# Altium PCB CANmon.PcbDoc
Units mm, origin at the board's own origin, x right, y up, seen from the top; angles counter-clockwise.
Board outline 50 x 80 mm, 2 copper layers (Top Layer, Bottom Layer); 38 components, 38 nets, 165 pads, 23 vias.
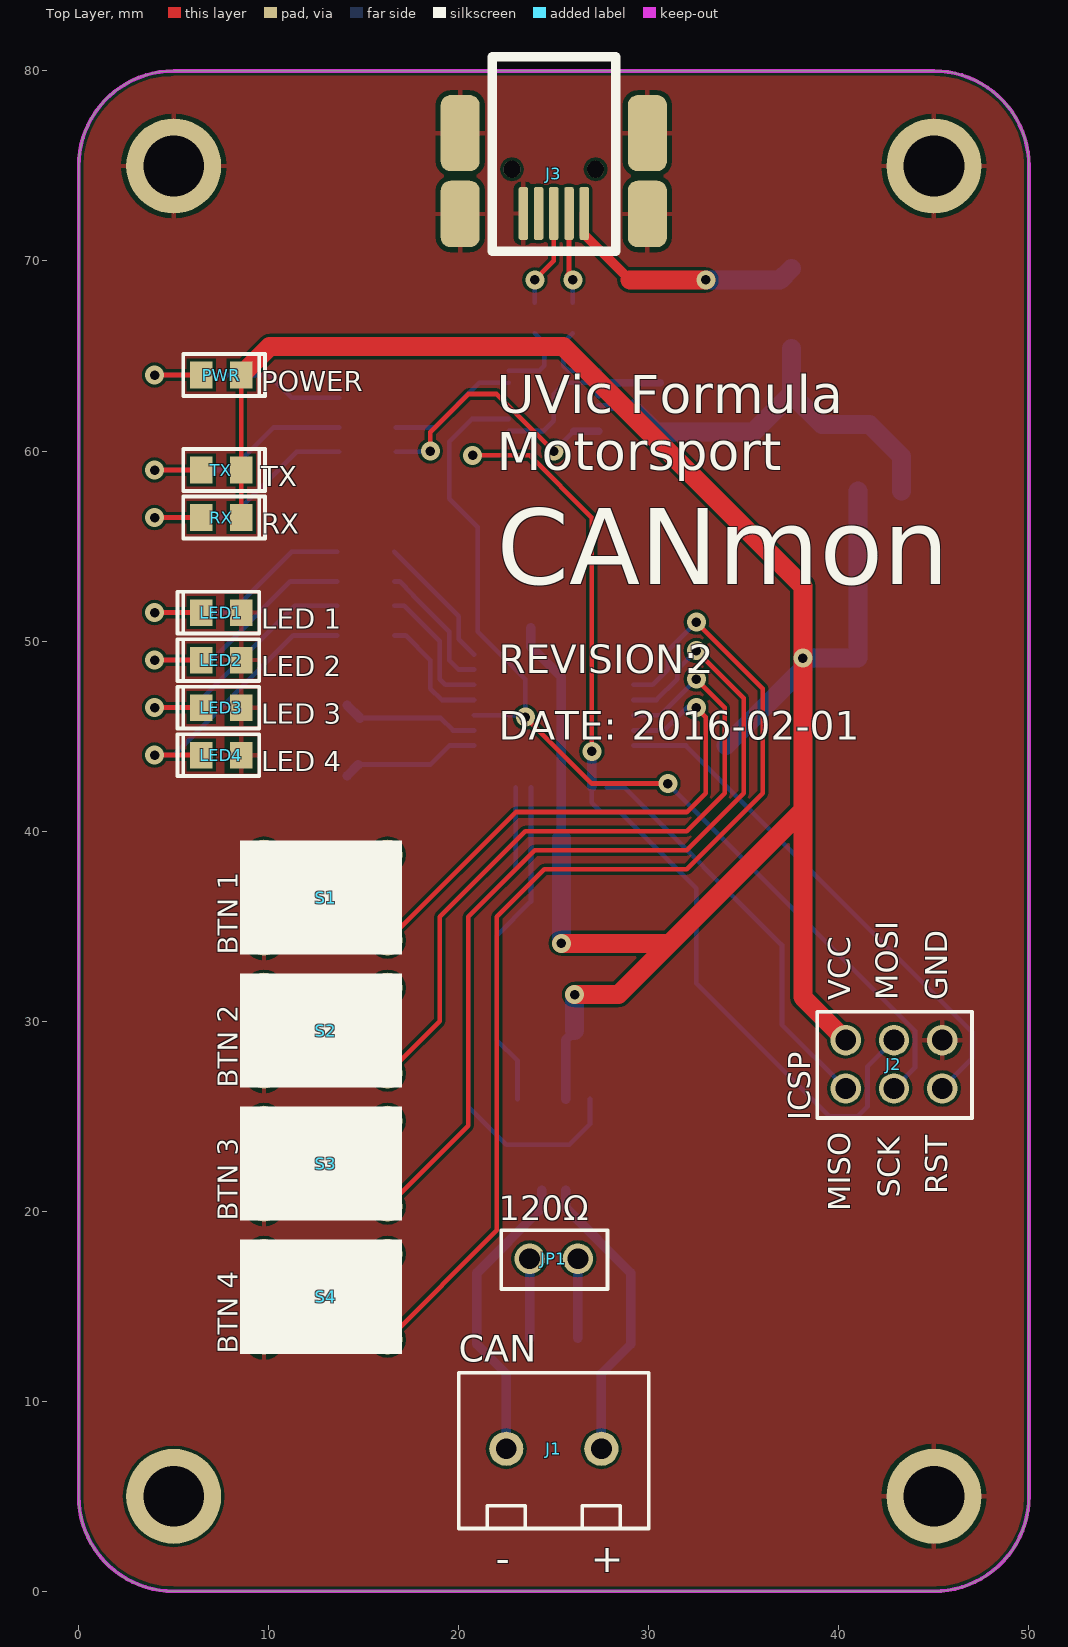
[diagram p0: Top Layer view]
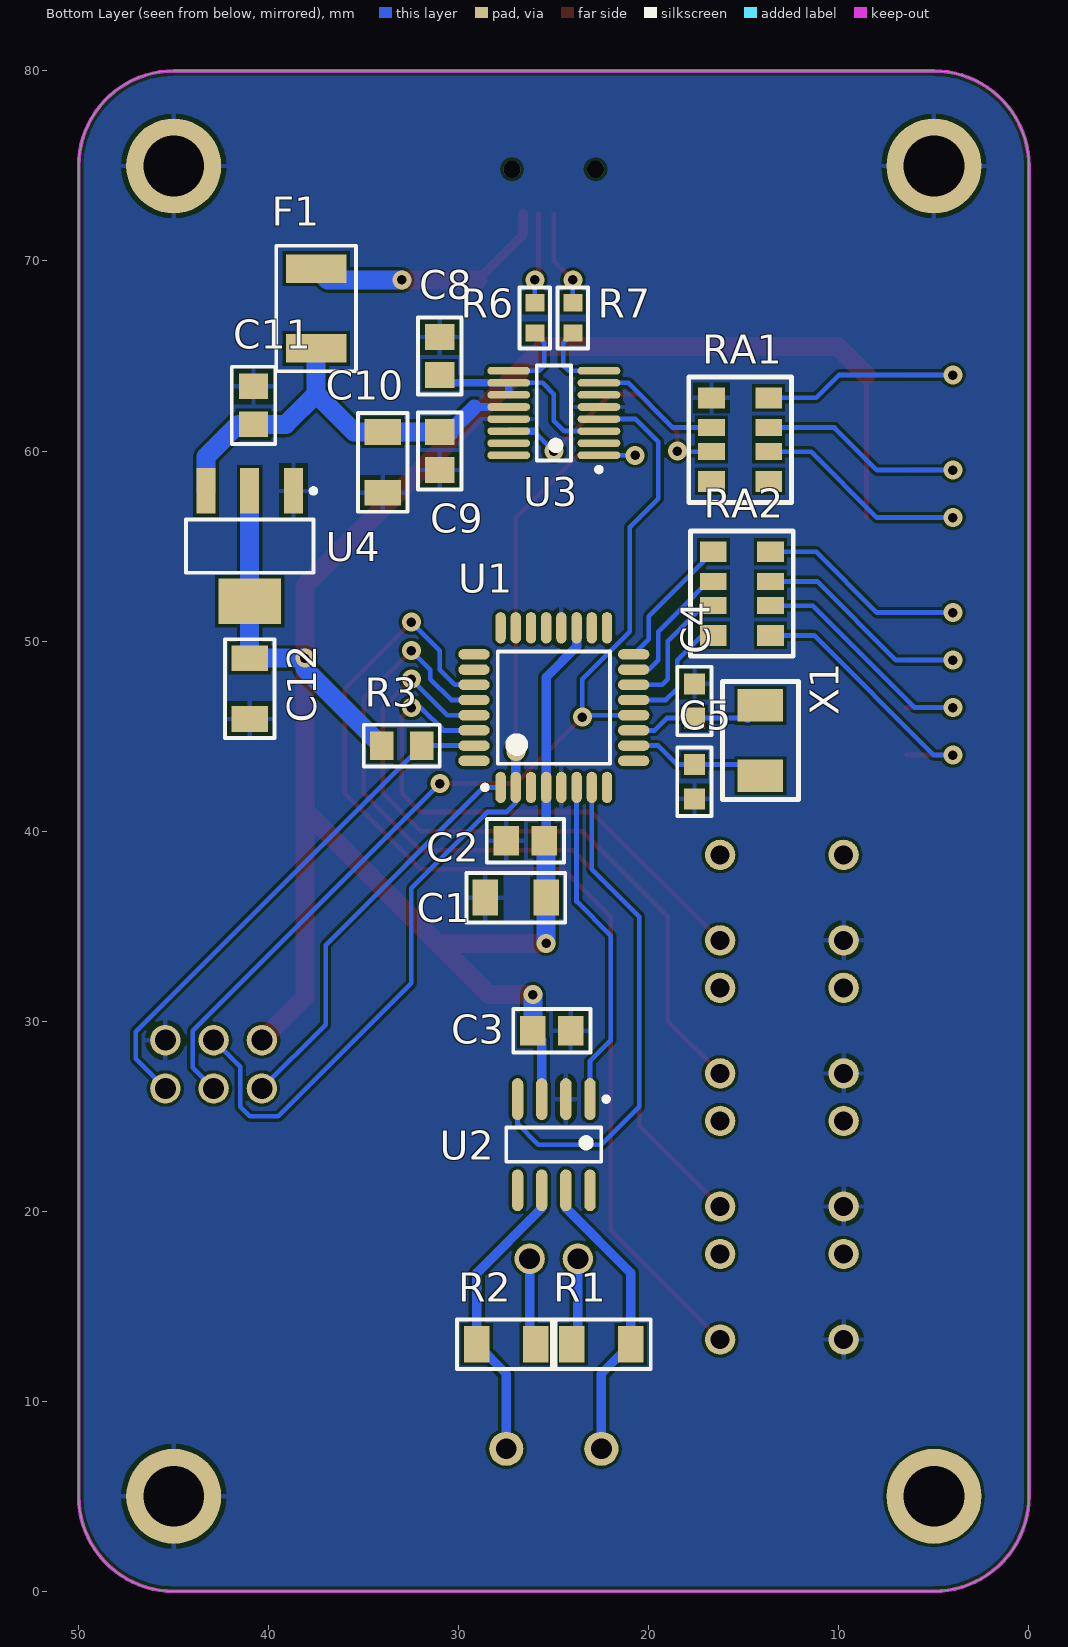
[diagram p1: Bottom Layer view, seen from below]

## Layer stack, top to bottom
Top Solder: solder mask 0.0102, Solder Resist, Dk 3.5
Top Layer: signal copper 0.0356
Dielectric 1: dielectric 0.32, FR-4, Dk 4.8
Bottom Layer: signal copper 0.0356
Bottom Solder: solder mask 0.0102, Solder Resist, Dk 3.5

## Board outline
0,5 0,75 cw(c5,75) 5,80 45,80 cw(c45,75) 50,75 50,5 cw(c45,5) 45,0 5,0 cw(c5,5)

## Design rules (kind name [scope] priority, off if disabled: settings)
Clearance [All] p1: gap=0.16
MinimumSolderMaskSliver [All] p1: minsoldermaskwidth=0.1
PolygonConnect [All] p1: connectstyle=Relief reliefconductorwidth=0.254 reliefentries=4 polygonreliefangle="90 Angle" airgapwidth=0.254
RoutingVias [All] p1: holewidth=0.6 width=1.3 viastyle="Through Hole" minholewidth=0.4 minwidth=0.7 maxholewidth=1 maxwidth=2
SolderMaskExpansion [All] p1: expansion=0.102
Width [All] p1: maxlimit=4 minlimit=0.16 preferedwidth=0.254
29 further rules are at their usual default settings.

## Components (designator, comment, footprint, x,y, rotation, side; value= is the part's Value field where it differs from the comment)
C1 "10µF" CAP-1206-M 27,36.5 r180 bottom
C2 "100nF" CAP-0805-M 26.5,39.5 r180 bottom
C3 "100nF" CAP-0805-M 25.1,29.5 r0 bottom
C4 "CC0603JRNPO9BN120" CAP-0603-M 17.6,46.85 r90 bottom
C5 "CC0603JRNPO9BN120" CAP-0603-M 17.6,42.6 r270 bottom
C8 "100nF" CAP-0805-M 31,65 r270 bottom
C9 "100nF" CAP-0805-M 31,60 r90 bottom
C10 "10µF" CAP-1206-M 34,59.4 r90 bottom
C11 "100nF" CAP-0805-M 40.8,62.4 r270 bottom
C12 "10µF" CAP-1206-M 41,47.5 r90 bottom
F1 "MF-MSMF050" MF-MSMF050 37.5,67.5 r270 bottom
J1 "282836-2" 282836-2 25,7.5 r0 top
J2 "ISP6PIN" ISP6PIN 42.9,29 r0 top
J3 "067503-1020" MOLX-67503-1020_V 25,72.5 r270 top
JP1 "M20-9990246" M20-9990246 25,17.5 r0 top
LED1 "LS R976-NR-1" LED-0805-RED 7.5,51.5 r0 top
LED2 "LS R976-NR-1" LED-0805-RED 7.5,49 r0 top
LED3 "LS R976-NR-1" LED-0805-RED 7.5,46.5 r0 top
LED4 "LS R976-NR-1" LED-0805-RED 7.5,44 r0 top
PWR "LS R976-NR-1" LED-0805-RED 7.5,64 r180 top
R1 "RC3216F60R4CS" RES-1206-M 22.5,13 r0 bottom
R2 "RC3216F60R4CS" RES-1206-M 27.5,13 r180 bottom
R3 "10K" RES-0805-M 33,44.5 r0 bottom
R6 "RC0603FR-0727RL" RES-0603-M 26,67 r270 bottom
R7 "RC0603FR-0727RL" RES-0603-M 24,67 r270 bottom
RA1 "100R" CAC-127P519X309-8M 15.2,60.6 r180 bottom
RA2 "100R" CAC-127P519X309-8M 15.1,52.5 r180 bottom
RX "LG R971-KN-1" LED-0805-GRN 7.5,56.5 r180 top
S1 "1825910-7" 1825910-7 13,36.5 r180 top
S2 "1825910-7" 1825910-7 13,29.5 r180 top
S3 "1825910-7" 1825910-7 13,22.5 r180 top
S4 "1825910-7" 1825910-7 13,15.5 r180 top
TX "LG R971-KN-1" LED-0805-GRN 7.5,59 r180 top
U1 "ATMEGA16M1" 32-TQFP-7X7-0.8 25,46.5 r90 bottom
U2 "SN65HVD232" 8-SOIC 25,23.5 r270 bottom
U3 "FT230XS" 16-SSOP-0.635MM 25,62 r0 bottom
U4 "LD1117S33TR" SOT-223_N 41,55 r270 bottom
X1 "7A-8.000MAAE-T" "TXC 7A" 14.13,44.766 r270 bottom

## Footprints (in the part's own frame and the unit in brackets; to place one, negate y for a bottom-side part, rotate by r counter-clockwise, add the part's x,y. Pads: shape width x height; smd on the part's side, far side on the other; paste and mask are expansions set on the pad)
8-SOIC [mm] "SOIC, 8-Leads, Body 4.9x3.9mm, Pitch 1.27mm, IPC Medium Density"
  oval 2.2x0.6 smd: 1(-2.4,1.905) 2(-2.4,0.635) 3(-2.4,-0.635) 4(-2.4,-1.905) 5(2.4,-1.905) 6(2.4,-0.635) 7(2.4,0.635) 8(2.4,1.905)
  silkscreen extent -2.52,-2.5 0.9,2.88, body extent -2,-2.5 2,2.5, height 1.75
16-SSOP-0.635MM [mm] "SOP, 16-Leads, Body 4.9x3.9mm, Pitch 0.635mm, IPC Medium Density"
  oval 2.25x0.4 smd: 1(-2.375,2.222) 2(-2.375,1.587) 3(-2.375,0.953) 4(-2.375,0.318) 5(-2.375,-0.318) 6(-2.375,-0.953) 7(-2.375,-1.587) 8(-2.375,-2.222) 9(2.375,-2.222) 10(2.375,-1.587) 11(2.375,-0.953) 12(2.375,-0.318) 13(2.375,0.318) 14(2.375,0.953) 15(2.375,1.587) 16(2.375,2.222)
  silkscreen extent -2.5,-2.5 0.9,3.1, body extent -1.99,-2.5 1.99,2.5, height 1.76
32-TQFP-7X7-0.8 [mm] "Thin QFP, 32-Leads, Body 7x7mm, Pitch 0.8mm, IPC Medium Density"
  oval 1.65x0.55 smd: 1(-4.2,2.8) 2(-4.2,2) 3(-4.2,1.2) 4(-4.2,0.4) 5(-4.2,-0.4) 6(-4.2,-1.2) 7(-4.2,-2) 8(-4.2,-2.8) 17(4.2,-2.8) 18(4.2,-2) 19(4.2,-1.2) 20(4.2,-0.4) 21(4.2,0.4) 22(4.2,1.2) 23(4.2,2) 24(4.2,2.8)
  oval 0.55x1.65 smd: 9(-2.8,-4.2) 10(-2,-4.2) 11(-1.2,-4.2) 12(-0.4,-4.2) 13(0.4,-4.2) 14(1.2,-4.2) 15(2,-4.2) 16(2.8,-4.2) 25(2.8,4.2) 26(2,4.2) 27(1.2,4.2) 28(0.4,4.2) 29(-0.4,4.2) 30(-1.2,4.2) 31(-2,4.2) 32(-2.8,4.2)
  silkscreen extent -4.32,-2.95 2.95,3.75, body extent -3.5,-3.5 3.5,3.5, height 1.2
282836-2 [mm]
  round 1.8 hole 1.1: 1(-2.5,0) 2(2.5,0)
  silkscreen extent -5,-4.2 5,4, body extent -5.6,-4.2 5,4, height 10.2
1825910-7 [mm]
  round 1.6 hole 1: 1(-3.25,2.25) 2(-3.25,-2.25) 3(3.25,2.25) 4(3.25,-2.25)
  body extent -3.9,-2.99 3.9,3, height 5
CAC-127P519X309-8M [mm] "Chip Array, ConvexS, 8-Leads, Pitch 1.27mm,  Body 5.20x3.10mm,  IPC Low Density"
  rect 1.4x1.1 smd: 1(-1.5,2.2) 4(-1.5,-2.2) 5(1.5,-2.2) 8(1.5,2.2)
  rect 1.4x0.9 smd: 2(-1.5,0.635) 3(-1.5,-0.635) 6(1.5,-0.635) 7(1.5,0.635)
  silkscreen extent -2.7,-3.3 2.7,3.3, body extent -1.7,-2.8 1.7,2.8, height 1
CAP-0603-M [mm] "Chip Capacitor, Body 1.6x0.8mm, Height 1.0mm, IPC Low Density"
  rect 1.1x1.1 smd: 1(-0.9,0) 2(0.9,0)
  silkscreen extent -1.8,-0.9 1.8,0.9, body extent -0.87,-0.47 0.88,0.48, height 1
CAP-0805-M [mm] "Chip Capacitor, Body 2.0x1.2mm, Height 1.55mm, IPC Low Density"
  rect 1.35x1.55 smd: 1(-1,0) 2(1,0)
  silkscreen extent -2.03,-1.14 2.03,1.14, body extent -1.1,-0.72 1.1,0.72, height 1.55
CAP-1206-M [mm] "Chip Capacitor, Body 3.2x1.6mm, Height 1.9mm, IPC Low Density"
  rect 1.35x1.9 smd: 1(-1.6,0) 2(1.6,0)
  silkscreen extent -2.6,-1.3 2.6,1.3, body extent -1.7,-0.9 1.7,0.9, height 1.9
ISP6PIN [mm]
  round 1.6 hole 1.1: 1(-2.54,-2.54) 2(-2.54,0) 3(0,-2.54) 4(0,0) 5(2.54,-2.54) 6(2.54,0)
  silkscreen extent -4.04,-4.1 4.1,1.5, body extent -3.79,-3.84 3.83,1.2, height 7.13
LED-0805-GRN [mm] "Chip Diode, 2-Leads, Body 2.00x1.25mm, IPC Medium Density"
  rect 1.2x1.4 smd: 1(-1.05,0) 2(1.05,0)
  silkscreen extent -2.3,-1.1 2,1.1, body extent -0.95,-0.67 0.95,0.67, height 0.9
LED-0805-RED [mm] "Chip Diode, 2-Leads, Body 2.00x1.25mm, IPC Medium Density"
  rect 1.2x1.4 smd: 1(-1.05,0) 2(1.05,0)
  silkscreen extent -2.3,-1.1 2,1.1, body extent -0.95,-0.67 0.95,0.67, height 0.9
M20-9990246 [mm]
  round 1.6 hole 1.1: 1(-1.27,0) 2(1.27,0)
  silkscreen extent -2.77,-1.6 2.83,1.5, body extent -2.51,-1.3 2.57,1.2, height 7.13
MF-MSMF050 [mm] "SMD, 2-Leads, Body 4.55x3.24mm"
  rect 1.5x3.2 smd: 1(-2.1,0) 2(2.1,0)
  silkscreen extent -3.3,-2.1 3.3,2.1, body extent -2.28,-1.62 2.28,1.62, height 0.85
MOLX-67503-1020_V [mm] "Mini USB Connector, SMT, Righer Angle"
  rrect50% 2.8x0.5 smd: 1(0,1.6) 2(0,0.8) 3(0,0) 4(0,-0.8) 5(0,-1.6)
  rrect50% 3.5x2.05 smd: 6(0.025,4.925) 8(0.025,-4.925)
  rrect50% 4x2.05 smd: 7(-4.225,4.925) 9(-4.225,-4.925)
  round 0.9 hole 0.9 unplated: X(-2.325,-2.2) Y(-2.325,2.2)
  silkscreen extent -8.25,-3.25 2,3.25, body extent -8.22,-4.96 0.78,4.94, height 3.95
RES-0603-M [mm] "Chip Resistor, Body 1.6x0.8mm, IPC Medium Density"
  rect 0.9x1 smd: 1(-0.8,0) 2(0.8,0)
  silkscreen extent -1.6,-0.8 1.6,0.8, body extent -0.85,-0.47 0.85,0.47, height 0.6
RES-0805-M [mm] "Chip Resistor, Body 2.0x1.3mm, IPC Low Density"
  rect 1.25x1.5 smd: 1(-1.05,0) 2(1.05,0)
  silkscreen extent -2,-1.1 2,1.1, body extent -1.1,-0.67 1.1,0.67, height 0.7
RES-1206-M [mm] "Chip Resistor, Body 3.2x1.6mm, IPC Low Density"
  rect 1.35x1.9 smd: 1(-1.55,0) 2(1.55,0)
  silkscreen extent -2.6,-1.3 2.6,1.3, body extent -1.67,-0.87 1.67,0.87, height 0.75
SOT-223_N [mm] "SOT223, 4-Leads, Body 6.5x3.5mm, Pitch 2.3mm, Lead Span 7mm, IPC Medium Density"
  rect 2.4x1 smd: 1(-2.9,2.3) 2(-2.9,0) 3(-2.9,-2.3)
  rect 2.4x3.3 smd: 4(2.9,0)
  silkscreen extent -3.02,-3.35 1.4,3.47, body extent -1.85,-3.35 1.85,3.35, height 1.8
"TXC 7A" [mm] "SMD Crystal"
  rect 1.7x2.4 smd: 1(-1.85,0) 2(1.85,0)
  silkscreen extent -3.1,-2 3.1,2, body extent -2.57,-1.68 2.58,1.68, height 1.35

## Part data
C1 C10 C12: library part CC1206KKX5R7BB106
C2 C3 C8 C9 C11: library part CC0805KRX7R8BB104
C4 C5: "CAP 12pF 5% 50V C0G,NP0 0603"
F1: "PTC Resettable Fuse 0.50A"
J1: "Terminal Block 2-pos Side Entry 5mm"
J2: "AVR ISP 2.54mm Header 2x3-Pin"
J3: "USB Mini-B"
JP1: library part JUMPER-1, "2.54mm Header Jumper"
LED1 LED2 LED3 LED4 PWR: "CHIPLED 0805 Red"
R1 R2: "RES 60R4 1% 0.25W 1206"
R3: library part RC0805FR-0710KL
R6 R7: "RES 0.1W 27R 1% 0603"
RA1 RA2: library part MNR34J5ABJ101
RX TX: "CHIPLED 0805 Green"
U1: "ATmega16M1 microcontroller"
U2: "CAN transceiver"
U3: "USB-RS232 Bridge 16-SSOP"
U4: "LDO 3.3V 0.8A SOT223"
X1: "SMD Crystal Oscillator 12 pF"

## Free pads (board coordinates)
  round 5 hole 3.2: 2(5,5) 2(5,75) 2(45,5) 2(45,75)

## Via types
v1: diameter 1, hole 0.5, Top Layer to Bottom Layer, tented both sides, 23 vias

## Nets (pads, with @x,y where several pads share a name; then routed paths per layer and width w, separated by ;. In a path a pad name is that pad's centre, name@x,y a point inside that pad or via, vN(x,y) a via of type N, cw(c..) or ccw(c..) an arc to the next point about the centre after c; other vN are vias at no path point)
+3V3: C1.2 C2.2 C3.2 C12.2 J2.2 PWR.1 R3.2 RX.1 TX.1 U1.4 U1.19 U2.3 U4.2 U4.4 | length 130.4
  Top Layer w0.25: RX.1 TX.1 PWR.1
  Top Layer w1: PWR.1 10.05,65.5 25.5,65.5 38.1,52.9 v1(38.1,49.1) 38.1,41.1 ; v1(25.4,34.1) 31.1,34.1 ; v1(26.1,31.4) 28.4,31.4 31.1,34.1 ; J2.2 38.1,31.26 38.1,41.1 ; 31.1,34.1 38.1,41.1
  Bottom Layer w0.5: U1.19 23.8,49.7 25.4,48.1 U1.4 C2.2@25.4,39.6 ; U2.3 25.635,29.035 C3.2
  Bottom Layer w1: v1(25.4,34.1) C1.2 C2.2@25.4,39.6 ; C3.2 v1(26.1,31.4) ; R3.2 38.1,48.55 v1(38.1,49.1) C12.2 U4.4 U4.2
+5V: C9.2 C10.2 C11.2 F1.2 U3.12 U4.3 | length 22.9
  Bottom Layer w0.4: U3.12 29.182,62.318
  Bottom Layer w0.8: 29.182,62.318 C9.2@30.5,61
  Bottom Layer w1: C9.2@30.5,61 C9.2 C10.2 35.5,61 37.5,63 ; F1.2 37.5,63 ; U4.3 43.3,59.7 41.6,61.4 C11.2 39.1,61.4 37.5,63
+VFTDI: C8.2 U3.3 U3.10 U3.11 | length 10.5
  Bottom Layer w0.25: U3.3 24.452,61.048 25,61.595 25,63 25.588,63.588 U3.10
  Bottom Layer w0.4: U3.11 U3.10 C8.2@30.588,63.588
CAN_N: J1.1 R1.1 U2.7 | length 15.7
  Bottom Layer w0.5: J1.1 22.5,11.45 R1.1 20.95,16.75 24.365,20.165 U2.7
CAN_P: J1.2 R2.1 U2.6 | length 15.7
  Bottom Layer w0.5: U2.6 25.635,20.165 29.05,16.75 R2.1 27.5,11.45 J1.2
CAN_RX: U1.7 U2.4 | length 26.8
  Bottom Layer w0.25: U1.7 23,38 20.5,35.5 20.5,25.5 22.5,23.5 25.81,23.5 26.905,24.595 U2.4
CAN_TX: U1.6 U2.1 | length 17.6
  Bottom Layer w0.25: U2.1 23.095,27.905 22,29 22,34.5 23.8,36.3 U1.6
GND: C1.1 C2.1 C3.1 C4.2 C5.2 C8.1 C9.1 C10.1 C11.1 C12.1 J2.6 J3.5 J3.6 J3.7 J3.8 J3.9 LED1.2 LED2.2 LED3.2 LED4.2 pad.2@5,75 pad.2@45,5 pad.2@45,75 RA1.1 S1.3 S2.3 S3.3 S4.3 U1.5 U1.20 U2.2 U3.5 U3.13 U4.1
LED1: RA2.1 U1.16 | length 7.1
  Bottom Layer w0.25: RA2.1 20,51.3 20,50.1 U1.16
LED2: RA2.2 U1.15 | length 7
  Bottom Layer w0.25: RA2.2 16.883,53.135 17.585,52.433 17.585,52.415 19.5,50.5 19.5,49 20,48.5 U1.15
LED3: RA2.3 U1.14 | length 7.1
  Bottom Layer w0.25: RA2.3 17.135,51.865 19,50 19,48 19.3,47.7 U1.14
LED4: RA2.4 U1.13 | length 6.5
  Bottom Layer w0.25: RA2.4 17.2,50.3 18.5,49 18.5,47.5 19.1,46.9 U1.13
MISO: J2.1 U1.1 | length 21.6
  Bottom Layer w0.254: U1.1 28.7,42.3 37,34 37,29.82 J2.1
NetC4_1: C4.1 U1.11 X1.1 | length 7.2
  Bottom Layer w0.25: X1.1@14.796,45.95 C4.1 19.05,45.95 19.7,45.3 U1.11
  Bottom Layer w0.5: X1.1 X1.1@14.796,45.95
NetC5_1: C5.1 U1.10 X1.2 | length 7.3
  Bottom Layer w0.25: X1.2@14.714,43.5 C5.1 18.5,43.5 19.5,44.5 U1.10
  Bottom Layer w0.5: X1.2 X1.2@14.714,43.5
NetF1_1: F1.1 J3.1 | length 13.2
  Top Layer w0.5: J3.1 26.6,71.4 29,69
  Top Layer w1: 29,69 v1(33,69)
  Bottom Layer w1: v1(33,69) 36.9,69 F1.1
NetJP1_1: JP1.1 R1.2 | length 4.2
  Bottom Layer w0.5: R1.2@23.73,13.32 JP1.1
NetJP1_2: JP1.2 R2.2 | length 4.2
  Bottom Layer w0.5: R2.2@26.27,13.32 JP1.2
NetLED1_1: LED1.1 RA2.8 | length 13.4
  Top Layer w0.25: v1(4,51.5) LED1.1
  Bottom Layer w0.25: v1(4,51.5) 8,51.5 11.2,54.7 RA2.8
NetLED2_1: LED2.1 RA2.7 | length 13.8
  Top Layer w0.25: v1(4,49) LED2.1
  Bottom Layer w0.25: v1(4,49) 7,49 11.135,53.135 RA2.7
NetLED3_1: LED3.1 RA2.6 | length 14.3
  Top Layer w0.25: v1(4,46.5) LED3.1
  Bottom Layer w0.25: v1(4,46.5) 6,46.5 11.365,51.865 RA2.6
NetLED4_1: LED4.1 RA2.5 | length 14.7
  Top Layer w0.25: v1(4,44) LED4.1
  Bottom Layer w0.25: v1(4,44) 5,44 11.3,50.3 RA2.5
NetPWR_2: PWR.2 RA1.8 | length 12.6
  Top Layer w0.25: v1(4,64) PWR.2
  Bottom Layer w0.25: v1(4,64) 10,64 11.2,62.8 RA1.8
NetR6_2: R6.2 U3.9 | length 3.9
  Bottom Layer w0.25: R6.2 25.5,65.7 25.5,64.5 25.777,64.223 U3.9
NetR7_2: R7.2 U3.8 | length 3.9
  Bottom Layer w0.25: U3.8 24.222,64.223 24.5,64.5 24.5,65.7 R7.2
NetRA1_6: RA1.6 RX.2 | length 13.6
  Top Layer w0.25: v1(4,56.5) RX.2
  Bottom Layer w0.25: v1(4,56.5) 8,56.5 11.465,59.965 RA1.6
NetRA1_7: RA1.7 TX.2 | length 13.1
  Top Layer w0.25: v1(4,59) TX.2
  Bottom Layer w0.25: v1(4,59) 8,59 10.235,61.235 RA1.7
R\E\S\E\T\: J2.5 R3.1 U1.31 | length 27.7
  Bottom Layer w0.25: U1.31 R3.1 47,29.45 47,28.02 J2.5
R\X\L\E\D\: RA1.3 U3.14 | length 14.1
  Top Layer w0.25: v1(18.5,60) 18.5,61 20.5,63 22,63 v1(25,60)
  Bottom Layer w0.25: RA1.3 v1@18.465,59.965 ; v1(25,60) 26.048,61.048
  Bottom Layer w0.4: 26.048,61.048 U3.14
RX_SCK: J2.3 U1.12 U3.4 | length 53.2
  Top Layer w0.25: v1(23.5,46) 27,42.5 v1(31,42.5)
  Bottom Layer w0.25: U1.12 v1@23.4,46.1 ; U3.4 20.683,61.683 19.5,60.5 19.5,57.5 21,56 21,50.5 23.5,48 v1(23.5,46) ; v1(31,42.5) 44,29.5 44,27.56 J2.3
SW1: S1.1 U1.30 | length 28.5
  Top Layer w0.25: S1.1 23,41 32,41 33,42 33,46 v1(32.5,46.5)
  Bottom Layer w0.25: U1.30 30.8,45.3 32,46.5 v1(32.5,46.5)
SW2: S2.1 U1.29 | length 37.8
  Top Layer w0.25: S2.1 19,30 19,35.5 23.5,40 32,40 34,42 34,46.5 v1(32.5,48)
  Bottom Layer w0.25: U1.29 30.6,46.1 v1(32.5,48)
SW3: S3.1 U1.28 | length 47.4
  Top Layer w0.25: S3.1 20.5,24.5 20.5,35.5 24,39 32,39 35,42 35,47 v1(32.5,49.5)
  Bottom Layer w0.25: U1.28 30.4,46.9 31.5,48 31.5,48.5 v1(32.5,49.5)
SW4: S4.1 U1.27 | length 57
  Top Layer w0.25: S4.1 22,19 22,35.5 24.5,38 32,38 36,42 36,47.5 v1(32.5,51)
  Bottom Layer w0.25: U1.27 30.2,47.7 31,48.5 31,49.5 v1(32.5,51)
T\X\L\E\D\: RA1.2 U3.7 | length 6.9
  Bottom Layer w0.25: RA1.2 18.735,61.235 21.088,63.588 U3.7
TX_MOSI: J2.4 U1.2 U3.1 | length 53.1
  Top Layer w0.25: v1(20.722,59.778) 23.723,59.778 27,56.5 v1(27,44.203)
  Bottom Layer w0.25: v1(20.722,59.778) U3.1 ; U1.2 27,41.5 27.5,41 28.5,41 32.5,37 32.5,32 39.5,25 41,25 41.5,25.5 41.5,27.6 J2.4
  Bottom Layer w0.5: U1.2 v1(27,44.203)
USB_D_N: J3.2 R6.1 | length 4.8
  Top Layer w0.25: v1@25.8,69.2 J3.2
  Top Layer w0.5: v1@25.8,69.2 v1(26,69)
  Bottom Layer w0.25: R6.1 v1(26,69)
USB_D_P: J3.3 R7.1 | length 5.1
  Top Layer w0.25: v1(24,69) 25,70 J3.3
  Bottom Layer w0.25: R7.1 v1(24,69)
pads on no net: J3.4 J3.X J3.Y RA1.4 RA1.5 S1.2 S1.4 S2.2 S2.4 S3.2 S3.4 S4.2 S4.4 U1.3 U1.8 U1.9 U1.17 U1.18 U1.21 U1.22 U1.23 U1.24 U1.25 U1.26 U1.32 U2.5 U2.8 U3.2 U3.6 U3.15 U3.16

## Polygon pours and split planes (outlines as drawn)
GND on Top Layer "GND_L01_P006" (solid, pour order 6): 0,5 0,75 cw(c5,75) 5,80 45,80 cw(c45,75) 50,75 50,5 cw(c45,5) 45,0 5,0 cw(c5,5)
GND on Bottom Layer "GND_L02_P007" (solid, pour order 7): 0,5 0,75 cw(c5,75) 5,80 45,80 cw(c45,75) 50,75 50,5 cw(c45,5) 45,0 5,0 cw(c5,5)

## Keep-outs
Keep-Out Layer:
  the board outline again, w0.2

## Silkscreen, mask and mechanical layers (free items; w line width, h text height)
Top Overlay:
  rectangle: 8.5,33.5 17,39.5
  rectangle: 8.5,26.5 17,32.5
  rectangle: 8.5,19.5 17,25.5
  rectangle: 8.5,12.5 17,18.5
  text "POWER" at 9.6,62.8 h1.8
  text "UVic Formula / Motorsport" at 22,59 h2
  text "TX" at 9.6,57.8 h1.8
  text "RX" at 9.6,55.3 h1.8
  text "CANmon" at 22,53 h4
  text "LED 1" at 9.6,50.3 h1.8
  text "REVISION:" at 22.1,48.3 h1.5
  text "2" at 32.1,48.3 h1.5
  text "LED 2" at 9.6,47.8 h1.8
  text "LED 3" at 9.6,45.3 h1.8
  text "DATE:" at 22.1,44.8 h1.5
  text "2016-02-01" at 29.1,44.8 h1.5
  text "LED 4" at 9.6,42.8 h1.8
  text "BTN 1" at 8.7,33.5 h1.8 r90
  text "BTN 2" at 8.7,26.5 h1.8 r90
  text "BTN 3" at 8.7,19.5 h1.8 r90
  text "120Ω" at 22.1,19.1 h2.2
  text "BTN 4" at 8.7,12.5 h1.8 r90
  text "CAN" at 20,11.6 h2.4
  text "-" at 21.95,1 h1.52
  text "+" at 26.95,1 h1.52
Mechanical 29:
  lines w0.2: 0,0 0,80 50,80 50,0 0,0

## Text inside footprints (layer, text, board x,y; h text height)
J2: Top Overlay "ICSP" at 38.886,24.8 h2 r90; Top Overlay "RST" at 46.1,20.9 h2 r90; Top Overlay "MISO" at 41,20 h2 r90; Top Overlay "SCK" at 43.6,20.7 h2 r90; Top Overlay "MOSI" at 43.5,31.1 h2 r90; Top Overlay "VCC" at 41,31.1 h2 r90; Top Overlay "GND" at 46.1,31.1 h2 r90